# EAGLE board atat_switch_v03 (EAGLE 7.5.0)
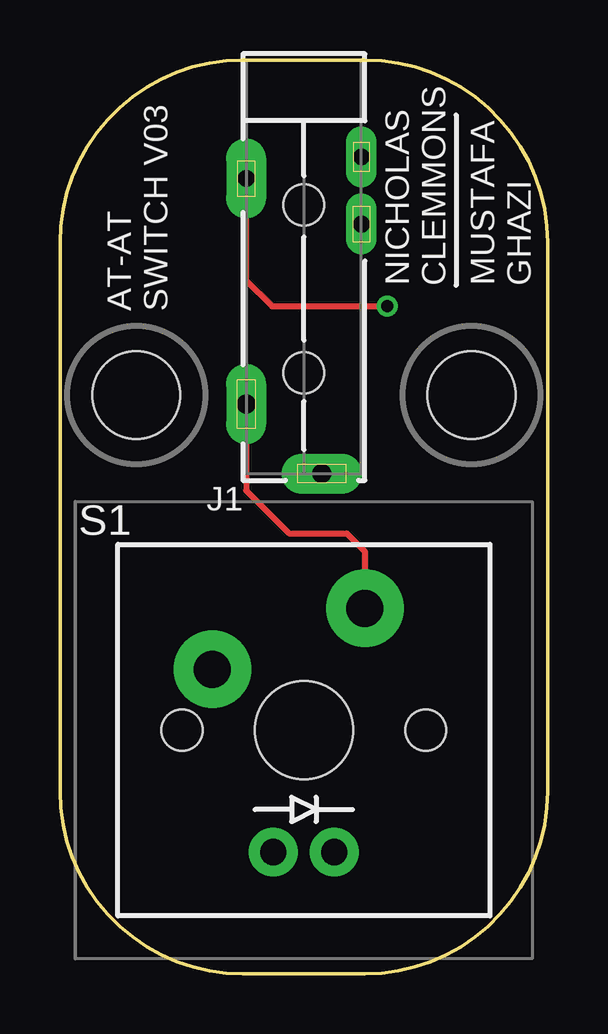
[diagram p0: board, top side]
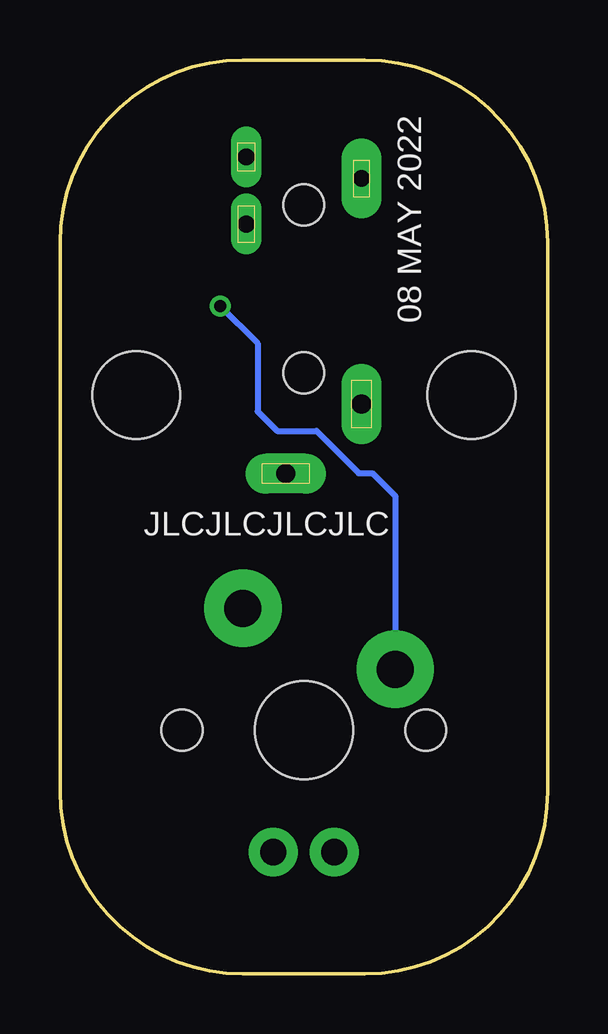
[diagram p1: board, bottom side, seen from below]

Size 20.32 x 38.1 mm. Coordinates in mm from the lower left corner, seen from the top.
Outline: 0,7.62 0,30.48 arc-90 7.62,38.1 12.7,38.1 arc-90 20.32,30.48 20.32,7.62 arc-90 12.7,0 7.62,0 arc-90 0,7.62
Copper layers (1*16): Top 0.0356mm / dielectric 1.5011mm / Bottom 0.0356mm
Design rules "oshpark-2layer *": minimum track width 6mil, minimum drill 13mil, track to track 6mil, track to pad 6mil, pad to pad 6mil, via to via 6mil, smd to smd 6mil, copper to edge 15mil, drill to drill 6mil, minimum pad ring 7mil, minimum via ring 7mil, stop-mask expansion 2.5mil, vias tented up to drill 22mil, thermal gap 10mil
Holes 3.66 mm at 17.14,24.13 3.17,24.13

## Footprints (pad centres in the part's own frame; a part is rotated, then mirrored left to right if it is on the bottom)
PJ-328A0-B-V02 = drill 0.7 pad 1.676 long: 1 2.4,2.4 | drill 0.8 pad 1.676 long: 2 2.4,11.8; 10 -0.75,14.7 | drill 0.7 pad 1.27 long: 3 -2.4,4.3; 11 -2.4,1.5 | hole 1.7: 0,3.5; 0,10.5
CHERRY-MX-YES-PINS-LED-SILK-V01 = drill 1.549 pad 3.226: 1 -3.81,2.54; 2 2.54,5.08 | drill 1.092 pad 2.032: 3 -1.27,-5.08; 4 1.27,-5.08 | hole 4.089: 0,0 | hole 1.702: 5.08,0; -5.08,0

## Placement (x,y rotation side)
J1  [PJ-328A0-B-V02]  10.16,35.56 180 top
S1  [CHERRY-MX-YES-PINS-LED-SILK-V01]  10.16,10.16 0 top

## Library data of the parts
J1 S1 = crawler_components

## Nets
S$1: J1.2 S1.2
S$2: J1.1 S1.1

## Tracks (layer width: path | path; a pad name or v marks a point on that pad's centre or on a via)
S$1
  Top 0.254: J1.2 7.76,20.16 9.55,18.36 11.94,18.36 12.7,17.6 S1.2
S$2  (via drill 0.51)
  Top 0.254: J1.1 7.75,33.15 7.75,28.93 8.84,27.84 v13.64,27.84
  Bottom 0.254: v13.64,27.84 12.09,26.29 12.09,23.44 11.28,22.63 9.63,22.63 7.87,20.88 7.31,20.88 6.35,19.91 S1.1

## Text on the board
tPlace: NICHOLAS / CLEMMONS | MUSTAFA / GHAZI | AT-AT / SWITCH V03
bPlace: 08 MAY 2022 | JLCJLCJLCJLC
tDocu: dia about 1.23 / Motherboads 6-32 (0.1440 in) or / M3 (3.15 mm, 0.1240 in) / Using Hole size 0.1440 in